# EAGLE board semaforo (EAGLE 6.5.0)
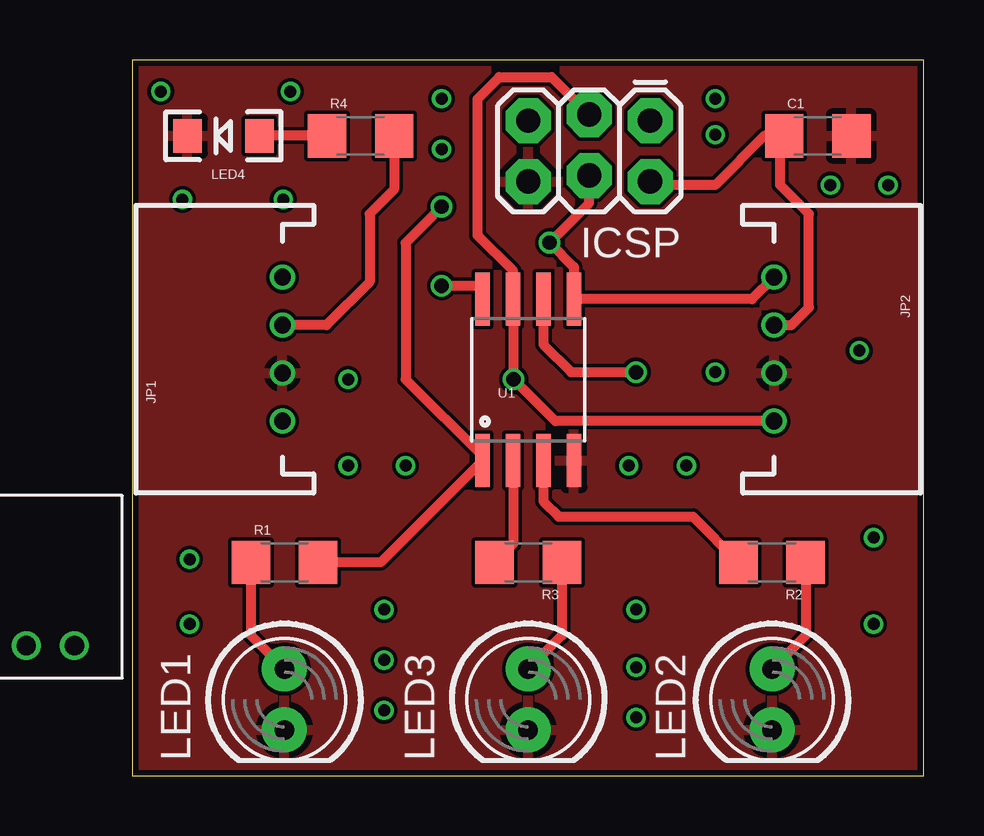
[diagram p0: board, top side]
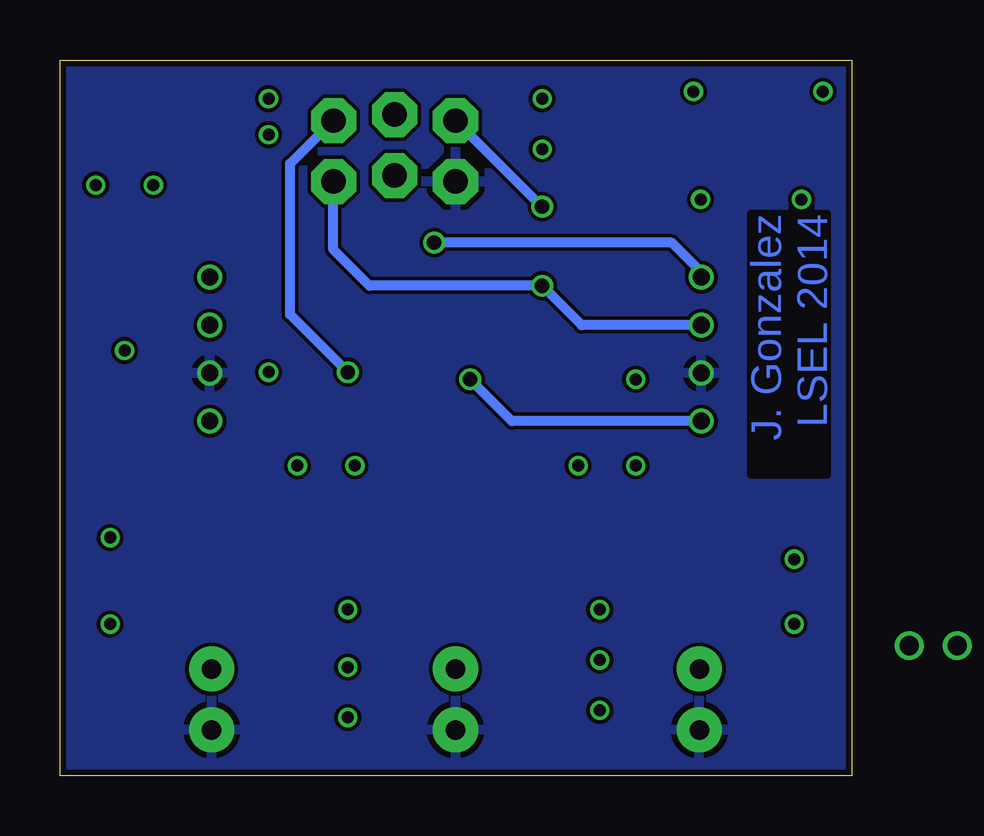
[diagram p1: board, bottom side, seen from below]

Size 32.99 x 29.84 mm. Coordinates in mm from the lower left corner, seen from the top.
Outline: 0,0 32.99,0 32.99,29.84 0,29.84 0,0
Copper layers (1*16): Top 0.035mm / dielectric 0.2mm / Bottom 0.035mm
Design rules "SeeedStudio_DRU_no_angle_20130527 *": minimum track width 6mil, minimum drill 12mil, track to track 6mil, track to pad 6mil, pad to pad 6mil, via to via 6mil, smd to smd 0mil, copper to edge 10mil, drill to drill 10mil, minimum pad ring 6mil, minimum via ring 6mil, stop-mask expansion 2mil, vias tented up to drill 25mil, thermal gap 10mil

## Footprints (pad centres in the part's own frame; a part is rotated, then mirrored left to right if it is on the bottom)
1206 = smd 1.6 x 1.8: 1 -1.4,0; 2 1.4,0
2X3_LOCK = drill 1.016 pad 1.88 octagon: 1 0,0; 2 0,2.54; 3 2.54,-0.254; 4 2.54,2.286; 5 5.08,0; 6 5.08,2.54
JST-S4B-PH = drill 0.8: P$1 -3,0; P$2 -1,0; P$3 1,0; P$4 3,0
JST-4-PTH = drill 0.7: 1 -3,-5; 2 -1,-5; 3 1,-5; 4 3,-5
LED5MM = drill 0.813 pad 1.88: A -1.27,0; K 1.27,0
LED-1206 = smd 1.2 x 1.4: A -1.5,0; C 1.5,0
SO08-EIAJ = smd 0.61 x 2.21: 1 -1.905,-3.378; 2 -0.635,-3.378; 3 0.635,-3.378; 4 1.905,-3.378; 5 1.905,3.353; 6 0.635,3.353; 7 -0.635,3.353; 8 -1.905,3.353

## Placement (x,y rotation side)
C1  [1206]  28.57,26.67 0 top
ICSP  AVR_SPI_PRG_62X3_LOCK  [2X3_LOCK]  21.59,27.3 180 top
J1  JST-S4B-PH  [JST-S4B-PH]  -5.4,5.42 0 top
JP1  [JST-4-PTH]  1.27,17.78 90 top
JP2  [JST-4-PTH]  31.75,17.78 270 top
LED1  [LED5MM]  6.35,3.17 270 top
LED2  [LED5MM]  26.67,3.17 270 top
LED3  [LED5MM]  16.51,3.17 270 top
LED4  [LED-1206]  3.81,26.67 180 top
R1  100  [1206]  6.35,8.89 0 top
R2  100  [1206]  26.67,8.89 180 top
R3  100  [1206]  16.51,8.89 180 top
R4  330  [1206]  9.53,26.67 0 top
U1  Tiny45-20-SMT  [SO08-EIAJ]  16.51,16.51 0 top

## Library data of the parts
C1 = SparkFun-Capacitors
ICSP = SparkFun-Connectors
J1 = jst-ph
JP1 JP2 = SparkFun-Connectors; SKU: PRT-09916
LED1-LED4 = SparkFun-LED
R1-R4 = SparkFun-Passives
U1 = SparkFun-DigitalIC; PROD_ID: IC-08922

## Nets
GND: C1.2 ICSP.6 JP1.2 JP2.3 LED1.K LED2.K LED3.K LED4.C U1.4
N$1: C1.1 ICSP.2 JP1.3 JP2.2 R4.2 U1.8
N$3: ICSP.4 JP1.4 JP2.1 U1.5
N$4: ICSP.3 JP1.1 JP2.4 U1.7
N$5: ICSP.5 R1.2 U1.1
N$6: R2.2 U1.3
N$7: R3.2 U1.2
N$8: LED4.A R4.1
N$10: LED1.A R1.1
N$11: ICSP.1 U1.6
N$12: LED2.A R2.1
N$13: LED3.A R3.1

## Tracks (layer width: path | path; a pad name or v marks a point on that pad's centre or on a via)
GND
  pour Bottom: 0,29.72 0,0.02 33,0.02 33,29.72
  pour Top: 0,29.72 33,29.72 33,0.02 0,0.02
N$1  (via drill 0.6)
  Top 0.406: ICSP.2 21.73,24.62 24.3,24.62 26.35,26.67 C1.1 27,26.49 27,24.62 28.2,23.42 28.2,19.52 27.46,18.78 JP2.2 | v12.9,20.42 14.7,20.42 14.7,19.96 U1.8 | R4.2 10.93,24.45 9.9,23.42 9.9,20.58 8.1,18.78 JP1.3
  Bottom 0.406: JP1.3 11.26,18.78 v12.9,20.42 20.1,20.42 21.6,21.92 ICSP.2
N$2  (via drill 0.5)
  other vias: 10.5,6.92
N$3  (via drill 0.6)
  Top 0.406: JP2.1 25.83,19.86 U1.5 18.41,21.21 v17.4,22.22 19.05,23.87 ICSP.4
  Bottom 0.406: JP1.4 6.27,20.99 7.5,22.22 v17.4,22.22
N$4  (via drill 0.6)
  Top 0.406: ICSP.3 17.49,29.12 15.3,29.12 14.4,28.22 14.4,22.52 15.88,21.04 U1.7 15.9,19.84 v15.9,16.52 17.64,14.78 JP2.4
  Bottom 0.406: JP1.1 14.16,14.78 v15.9,16.52
N$5  (via drill 0.6)
  Top 0.305: 8.05,9.19 R1.2
  Top 0.406: R1.2 10.36,8.89 U1.1 14.61,13.31 11.4,16.52 11.4,22.22 v12.9,23.72
  Bottom 0.406: ICSP.5 12.93,23.72 v12.9,23.72
N$6
  Top 0.406: U1.3 17.14,11.43 17.78,10.8 23.36,10.8 R2.2
N$7
  Top 0.406: U1.2 15.88,9.66 R3.2
N$8
  Top 0.406: R4.1 LED4.A
N$9  (via drill 0.5)
  other vias: 10.5,4.82
N$10
  Top 0.406: R1.1 4.95,5.84 LED1.A
N$11  (via drill 0.6)
  Top 0.406: U1.6 17.14,17.98 18.3,16.82 v21,16.82
  Bottom 0.406: v21,16.82 23.4,19.22 23.4,25.52 21.61,27.3 ICSP.1
N$12
  Top 0.406: R2.1 28.07,5.84 LED2.A
N$13
  Top 0.406: R3.1 17.91,5.84 LED3.A
N$14  (via drill 0.5)
  other vias: 10.5,2.72
N$15  (via drill 0.5)
  other vias: 21,2.42
N$16  (via drill 0.5)
  other vias: 21,4.52
N$17  (via drill 0.5)
  other vias: 21,6.92
N$18  (via drill 0.5)
  other vias: 12.9,28.22
N$19  (via drill 0.5)
  other vias: 12.9,26.12
N$20  (via drill 0.5)
  other vias: 24.3,28.22
N$21  (via drill 0.5)
  other vias: 24.3,26.72
N$22  (via drill 0.5)
  other vias: 29.1,24.62
N$23  (via drill 0.5)
  other vias: 31.5,24.62
N$24  (via drill 0.5)
  other vias: 30.3,17.72
N$25  (via drill 0.5)
  other vias: 30.9,9.92
N$26  (via drill 0.5)
  other vias: 30.9,6.32
N$27  (via drill 0.5)
  other vias: 20.7,12.92
N$28  (via drill 0.5)
  other vias: 23.1,12.92
N$29  (via drill 0.5)
  other vias: 9,12.92
N$30  (via drill 0.5)
  other vias: 11.4,12.92
N$31  (via drill 0.5)
  other vias: 9,16.52
N$32  (via drill 0.5)
  other vias: 2.1,24.02
N$33  (via drill 0.5)
  other vias: 6.3,24.02
N$35  (via drill 0.5)
  other vias: 2.4,9.02
N$36  (via drill 0.5)
  other vias: 2.4,6.32
N$37  (via drill 0.5)
  other vias: 24.3,16.82
N$38  (via drill 0.5)
  other vias: 1.2,28.52
N$39  (via drill 0.5)
  other vias: 6.6,28.52

## Text on the board
Bottom: J. Gonzalez / LSEL 2014